# Altium PCB PA-03225-V0.4-4.PcbDoc (part 4 of 4)
Units mm, origin at the board's own origin, x right, y up, seen from the top; angles counter-clockwise.
Board outline 43 x 41 mm, 6 copper layers (Top Layer, GND, L3, L4, PWR, Bottom Layer); 103 components, 178 nets, 551 pads, 290 vias.
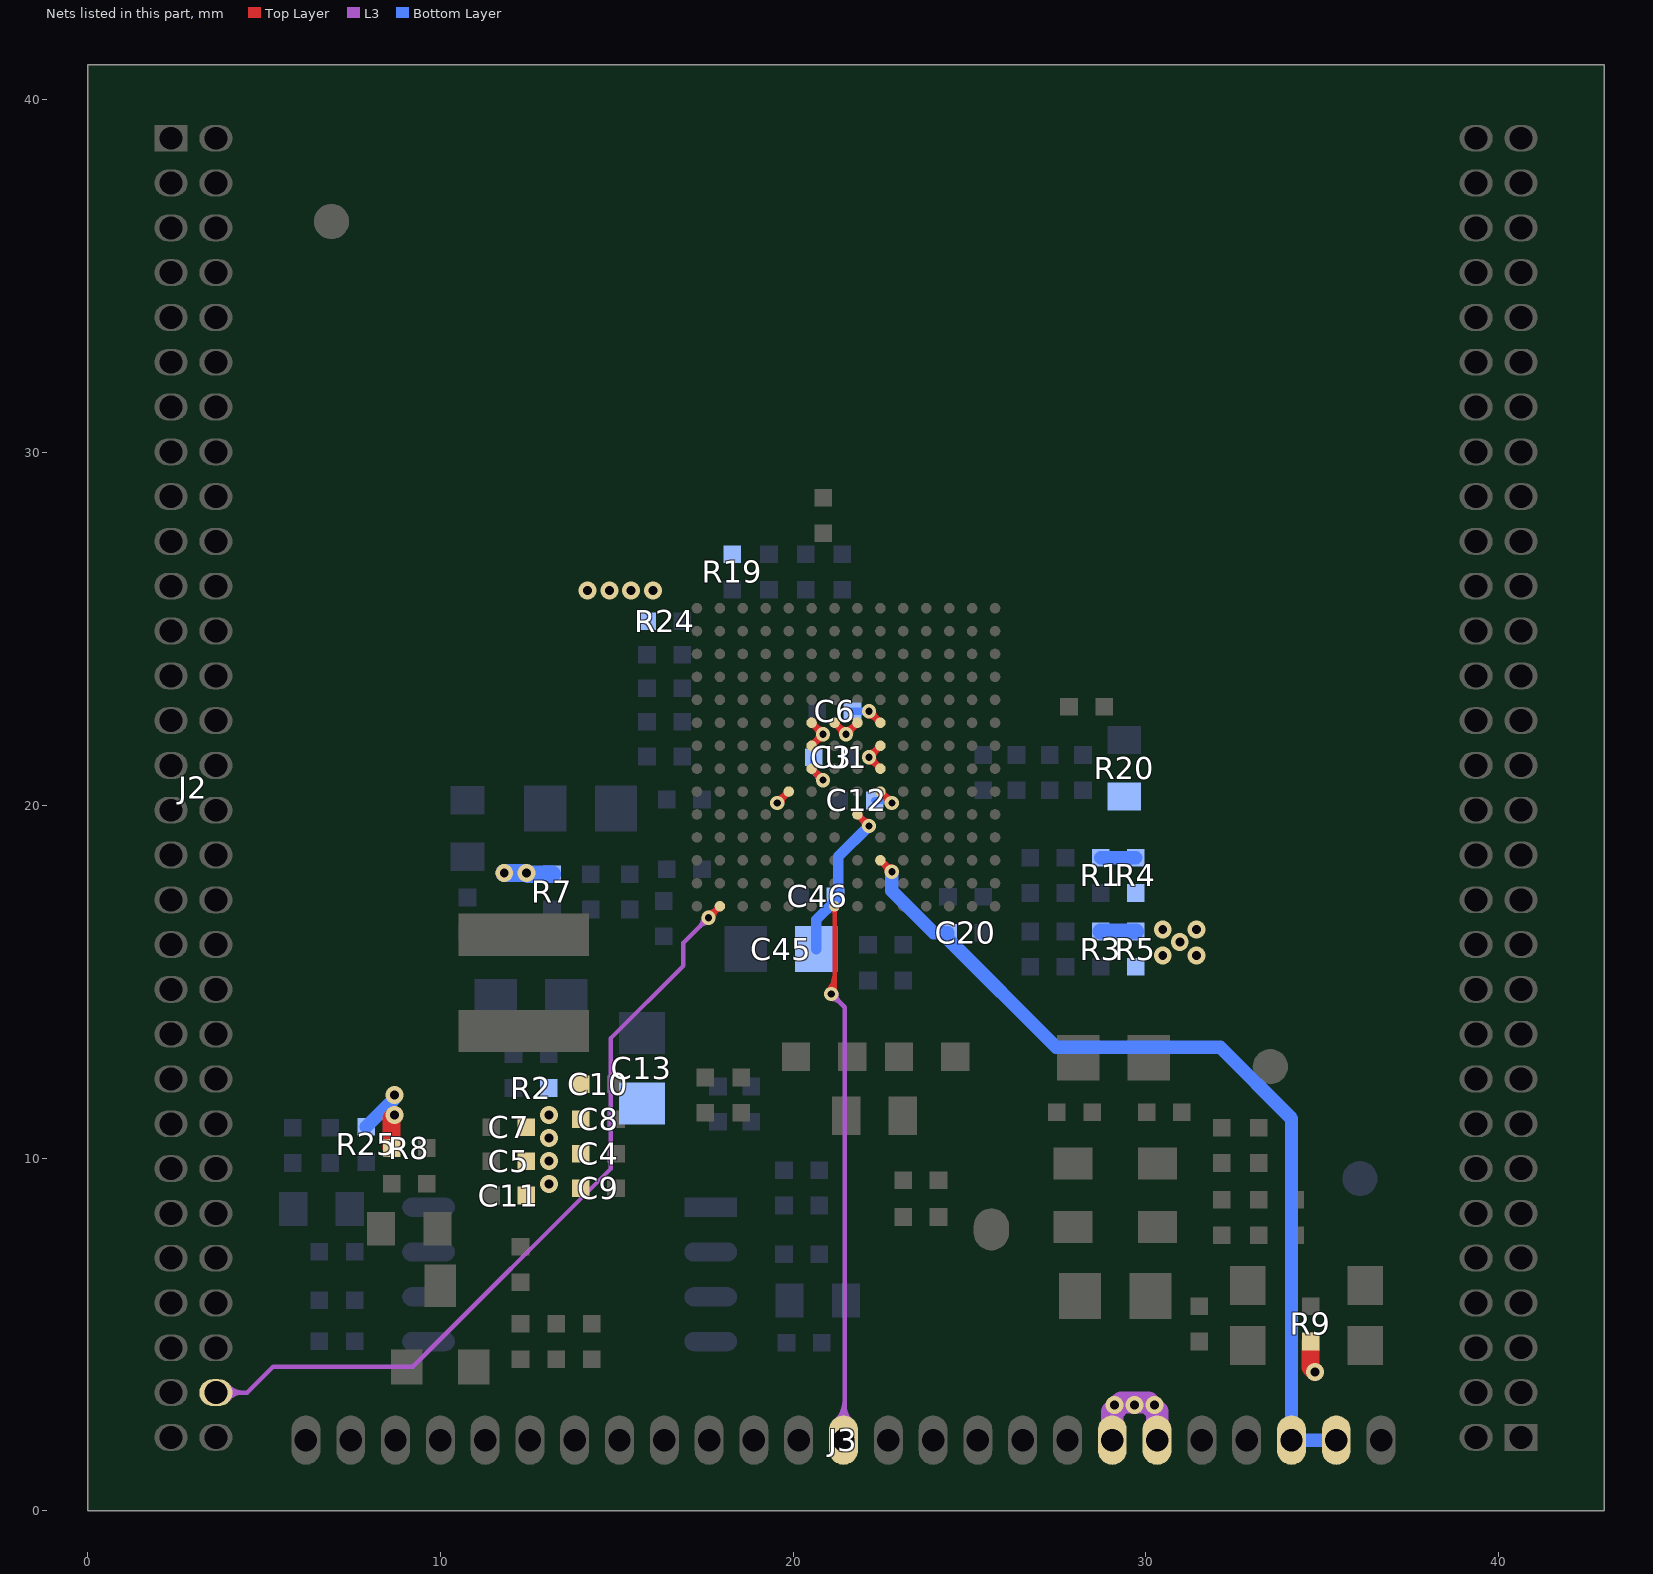
[diagram p8: the nets of this part, all layers, seen from the top]

## Via types
v1: diameter 0.508, hole 0.254, Top Layer to Bottom Layer, tented both sides, 169 vias
v2: diameter 0.406, hole 0.203, Top Layer to Bottom Layer, tented both sides, 78 vias
v3: diameter 0.356, hole 0.203, Top Layer to Bottom Layer, tented both sides, 42 vias
v4: diameter 0.7, hole 0.4, Top Layer to Bottom Layer, tented both sides, 1 vias

## Nets (pads, with @x,y where several pads share a name; then routed paths per layer and width w, separated by ;. In a path a pad name is that pad's centre, name@x,y a point inside that pad or via, vN(x,y) a via of type N, cw(c..) or ccw(c..) an arc to the next point about the centre after c; other vN are vias at no path point) (continued)
P2: J2.58 U1.P2 | length 26.6
  Top Layer w0.127: v2@17.589,16.958 ccw(c17.564,17.287) U1.P2@17.85,17.122 ; v2(17.6,16.819) U1.P2@17.925,17.144 ; v2@17.6,16.958 ccw(c17.6,17.296) 17.838,17.057 ccw(c18.077,16.819) v2@17.74,16.819 ; v2@17.63,16.955 ccw(c17.663,17.105) 17.796,17.028 ; v2@17.736,16.849 cw(c17.887,16.881) 17.81,17.015 ; v2@17.739,16.808 cw(c18.068,16.783) U1.P2@17.903,17.069 ; U1.P2@17.839,17.144 cw(c17.63,17.144) 17.777,16.996 cw(c17.925,16.848) U1.P2@17.925,17.057
  L3 w0.127: J2.58@3.635,3.355 4.523,3.355 5.258,4.089 9.22,4.089 14.825,9.694 14.825,13.394 16.891,15.46 16.891,16.11 v2(17.6,16.819) ; J2.58@3.87,3.233 cw(c4.131,3.015) 4.131,3.355 cw(c4.131,3.694) J2.58@3.87,3.477 ; J2.58@3.968,3.151 cw(c4.402,2.789) 4.402,3.355 cw(c4.402,3.92) J2.58@3.968,3.558 ; v2@17.46,16.819 cw(c17.123,16.819) 17.362,16.58 cw(c17.6,16.342) v2@17.6,16.679
P7_USB_OTG2_DP: J3.13 U1.P7 | length 18.4
  Top Layer w0.127: v2@20.983,14.755 ccw(c20.52,15.218) 21.175,15.218 ; v2@21.048,14.656 v2@21.065,14.673 ; v2@21.073,14.665 ccw(c20.827,14.911) 21.175,14.911 ; v2(21.082,14.656) v2@21.175,14.749 ; U1.P7@21.114,17.082 cw(c20.966,16.935) 21.175,16.935 cw(c21.384,16.935) U1.P7@21.236,17.082 ; v2@21.158,14.766 21.175,14.783 U1.P7@21.175,17.144
  L3 w0.127: v2@21.082,14.516 cw(c21.082,14.179) 21.32,14.417 cw(c21.559,14.656) v2@21.222,14.656 ; v2(21.082,14.656) 21.463,14.275 J3.13@21.463,2.042 ; J3.13@21.226,2.561 ccw(c20.655,3.132) 21.463,3.132 ; J3.13@21.316,2.471 ccw(c20.962,2.825) 21.463,2.825 ; 21.463,2.968 ccw(c22.039,2.968) J3.13@21.632,2.561
VCC33: J3.19 J3.20 R4.1 R5.1 R7.1 R8.1 R9.1 R19.1 R20.1 R24.2 R25.1 | length 10.7
  Top Layer w0.508: R8.1@8.619,10.287 8.619,11.144 v1(8.7,11.224) ; R9.1@34.671,4.804 34.671,4.064 v1(34.798,3.937)
  L3 w0.635: v1@29.049,2.811 v1@29.312,3.073 ; v1@29.049,2.811 J3.19@29.049,2.008 v1@29.049,2.811 ; v1@29.049,2.811 v1@29.312,3.073 ; v1@29.312,3.073 v1@30.065,3.073 ; v1@29.312,3.073 v1@30.065,3.073 ; v1@30.065,3.073 v1@30.319,2.819 ; v1@30.065,3.073 v1@30.319,2.819 ; v1@30.319,2.819 J3.20@30.319,2.008 v1@30.319,2.819
  Bottom Layer w0.381: R25.1@7.899,10.889 8.7,11.689 v1(8.7,11.786)
  Bottom Layer w0.508: v1(11.811,18.087) v1(12.446,18.087) 12.483,18.05 R7.1@13.165,18.05
  other v1: 29.108,2.997 29.68,2.997 30.251,2.997 30.48,15.748 31.442,15.748 30.963,16.129 30.48,16.485 31.442,16.485 14.173,26.094 14.791,26.094 15.409,26.094 16.027,26.094
VDD_HIGH_IN_3V3: R3.1 R5.2 | length 1
  Bottom Layer w0.457: R3.1@28.72,16.426 R5.2@29.718,16.426
VDD_SNVS_IN: C20.2 J3.23 J3.24 U1.M9 | length 26
  Top Layer w0.203: U1.M9@22.475,18.444 v2(22.8,18.119) ; v2@22.698,18.119 ccw(c22.453,18.119) 22.627,18.292 ccw(c22.8,18.465) v2@22.8,18.22
  L3 w0.127: J3.24@35.296,2.008 J3.24@35.399,2.008
  Bottom Layer w0.381: v2(22.8,18.119) 22.8,17.578 23.986,16.392 C20.2@24.392,16.392 24.392,16.214 27.458,13.148 32.106,13.148 34.129,11.125 J3.23@34.129,2.008 J3.24@35.399,2.008
VDD_SOC_IN: C3.1 C4.1 C5.1 C6.1 C7.1 C8.1 C9.1 C10.1 C11.1 C12.2 C13.2 R2.1 U1.F6 U1.F7 U1.F8 U1.F9 U1.G6 U1.G9 U1.H6 U1.H9 U1.J5 U1.J9 | length 10.6
  Top Layer w0.203: v2(19.55,20.069) U1.J5@19.875,20.394 ; v2@19.55,20.17 ccw(c19.55,20.415) 19.723,20.242 ccw(c19.897,20.069) v2@19.652,20.069 ; U1.H6@20.525,21.044 v2(20.85,20.719) ; U1.G6@20.525,21.694 v2(20.85,22.019) U1.F6@20.525,22.344 ; v2@20.748,20.719 ccw(c20.503,20.719) 20.677,20.892 ccw(c20.85,21.065) v2@20.85,20.82 ; v2@20.85,21.917 ccw(c20.85,21.672) 20.677,21.845 ccw(c20.503,22.019) 20.748,22.019 ccw(c20.503,22.019) 20.677,22.192 ccw(c20.85,22.366) v2@20.85,22.12 ; U1.F7@21.175,22.344 v2(21.5,22.019) U1.F8@21.825,22.344 ; v2@21.398,22.019 ccw(c21.153,22.019) 21.327,22.192 ccw(c21.5,22.365) 21.5,22.12 ccw(c21.5,22.365) 21.673,22.192 ccw(c21.847,22.019) v2@21.602,22.019 ; v2@22.15,21.267 cw(c22.15,21.022) 22.323,21.195 cw(c22.497,21.369) 22.252,21.369 cw(c22.497,21.369) 22.323,21.542 cw(c22.15,21.715) v2@22.15,21.47 ; v2@22.15,22.567 cw(c22.15,22.322) 22.323,22.495 cw(c22.497,22.669) v2@22.252,22.669 ; v2(22.15,22.669) U1.F9@22.475,22.344 ; U1.J9@22.475,20.394 v2(22.8,20.069) ; U1.H9@22.475,21.044 v2(22.15,21.369) U1.G9@22.475,21.694 ; v2@22.698,20.069 ccw(c22.453,20.069) 22.627,20.242 ccw(c22.8,20.415) v2@22.8,20.17
  Bottom Layer w0.203: C3.1@20.582,21.361 20.582,20.987 v2(20.85,20.719) ; v2@20.748,20.719 ccw(c20.503,20.719) 20.677,20.892 ccw(c20.85,21.065) v2@20.85,20.82 ; C6.1@21.684,22.669 v2(22.15,22.669) ; C12.2@22.31,20.141 22.728,20.141 v2(22.8,20.069)
  other v1: 13.081,9.271 13.081,9.922 13.081,10.573 13.081,11.224
VDD_USB_3V: C45.2 C46.2 U1.K8 | length 5
  Top Layer w0.203: U1.K8@21.825,19.744 v2(22.15,19.419) ; v2@22.048,19.419 ccw(c21.803,19.419) 21.977,19.592 ccw(c22.15,19.765) v2@22.15,19.52
  Bottom Layer w0.305: C45.2@20.66,15.928 20.66,16.76 21.201,17.301 C46.2@21.201,17.423 21.282,17.504 21.282,18.55 v2(22.15,19.419)
VDDA_ADC_3V3: R1.1 R4.2 | length 1
  Bottom Layer w0.381: R1.1@28.72,18.519 R4.2@29.718,18.519
pads on no net: U1.N13 U1.P13

## Polygon pours and split planes (outlines as drawn)
GND on L3 "Top Layer-GND" (solid, remove dead copper, pour order 5): 0,41 43,41 43,0 0,0
GND on Top Layer "Top Layer-GND" (solid, remove dead copper, pour order 6): 0,41 43,41 43,0 0,0
GND on Bottom Layer "Top Layer-GND" (solid, remove dead copper, pour order 7): 0,41 43,41 43,0 0,0
GND on L4 "Top Layer-GND" (solid, remove dead copper, pour order 8): 0,41 43,41 43,0 0,0
GND on GND (split plane): 42.49,0.51 0.51,0.51 0.51,40.49 42.49,40.49
VDD_SOC_IN on PWR (split plane): 29.589,21.782 29.589,9.071 28.984,8.466 13.053,8.466 12.401,9.118 12.401,10.212 12.401,14.027 17.973,19.599 21.238,22.864 28.506,22.864
DCDC_3V3 on PWR (split plane): 12.142,10.212 12.142,9.064 12.152,9.015 12.18,8.973 12.908,8.245 12.95,8.217 12.999,8.207 29.038,8.207 29.087,8.217 29.129,8.245 29.772,8.888 36.193,8.888 36.193,5.057 11.077,5.057 9.248,6.886 9.248,12.215 9.452,12.418 12.142,12.418
VCC33 on PWR (split plane): 42.49,0.51 0.51,0.51 0.51,40.49 42.49,40.49

## Keep-outs
Keep-Out Layer:
  the board outline again, w0.254

## Other copper
Top Layer:
  region net GND: 14.58,15.113 14.58,12.497 14.707,12.37 14.707,8.788 14.859,8.636 15.291,8.636 15.545,8.89 15.545,15.316 15.367,15.494 14.961,15.494
  pour cut-out: 8.865,25.801 8.994,25.672 13.523,25.672 13.523,26.303 13.359,26.467 9.002,26.467 8.865,26.329
  pour cut-out: 26.2,4.686 26.64,4.246 30.074,4.246 32.029,6.202 32.029,14.362 31.472,14.92 26.769,14.92 26.2,14.35
  pour cut-out: 21.006,13.412 21.006,10.82 21.488,10.338 24.464,10.338 24.992,10.866 24.992,13.62 24.083,14.529 22.113,14.529 21.268,13.683
  pour cut-out: 16.535,26.365 26.475,26.365 26.547,26.293 26.547,16.383 26.532,16.369 16.5,16.369
  region net VCC33: 8.89,10.287 9.119,10.516 9.119,11.864 8.89,12.093 8.41,12.093 8.255,11.938 8.255,10.287
  region net NetL1_1: 10.668,16.871 10.755,16.958 13.014,16.958 14.651,18.595 17.632,18.595 17.632,18.344 17.526,18.237 17.039,18.237 14.55,15.748 10.784,15.748 10.668,15.864
  region net VDD_SOC_IN: 13.716,12.319 12.506,11.109 12.18,11.109 12.18,8.699 13.862,8.699 14.224,9.06 14.224,12.319
  region net DCDC_OUT: 14.199,13.284 12.319,11.405 10.77,11.405 10.606,11.569 10.606,13.411 11.385,14.19 14.181,14.19 14.199,14.173
  pour cut-out: 33.53,14.095 cw(c33.53,12.595) 35.03,12.595 cw(c33.53,12.595) 33.53,11.095 cw(c33.53,12.595) 32.03,12.595 cw(c33.53,12.595)
  pour cut-out: 6.912,35.054 cw(c6.912,36.554) 5.412,36.554 cw(c6.912,36.554) 6.912,38.054 cw(c6.912,36.554) 8.412,36.554 cw(c6.912,36.554)
L3:
  pour cut-out: 26.547,19.387 26.547,18.887 26.64,18.794 29.791,18.794 29.817,18.769 29.817,19.027 29.235,19.609 26.563,19.609
  pour cut-out: 18.059,6.339 15.6,3.88 15.6,3.556 16.434,3.556 18.698,5.82 18.698,6.121 18.393,6.426 18.14,6.426
  pour cut-out: 16.535,26.365 26.475,26.365 26.547,26.293 26.547,16.383 26.532,16.369 16.5,16.369
L4:
  pour cut-out: 8.81,14.021 11.074,16.285 11.074,16.713 10.77,17.018 10.389,17.018 8.327,14.957 8.327,14.177 8.484,14.021
  pour cut-out: 16.535,26.365 26.475,26.365 26.547,26.293 26.547,16.383 26.532,16.369 16.5,16.369
Bottom Layer:
  region net VDD_SOC_IN: 16.559,12.245 16.916,11.887 16.916,9.601 16.078,8.763 12.903,8.763 12.675,8.992 12.675,12.067 12.852,12.245
  region net MCU_DCDC_IN: 13.97,20.126 13.97,18.076 14.266,17.78 16.002,17.78 16.103,17.679 16.51,17.679 16.918,18.087 16.918,20.035 16.379,20.574 14.418,20.574
  pour cut-out: 16.535,26.365 26.475,26.365 26.547,26.293 26.547,16.383 26.532,16.369 16.5,16.369
  region net GND: 19.05,29.997 19.507,30.455 21.285,30.455 21.895,29.845 21.895,27 21.717,26.822 21.692,26.848 19.05,26.848
  region net GND: 13.682,20.642 14.072,21.031 16.08,21.031 16.207,21.158 16.207,24.501 16.027,24.681 14.461,24.681 13.538,25.603 13.538,26.217 13.339,26.416 11.836,26.416 11.836,19.812 12.395,19.253 13.651,19.253 13.682,19.285
  region net VCC33: 18.567,26.848 16.789,26.848 16.307,26.365 16.307,25.269 16.108,25.07 14.63,25.07 13.919,25.781 13.919,27.108 14.7,27.889 18.481,27.889 18.582,27.788 18.567,27.773
  region net VCC33: 7.671,10.706 7.671,11.913 7.823,12.065 8.89,12.065 9.017,11.938 9.017,10.975 8.735,10.693 7.684,10.693
  region net VCC33: 11.519,18.009 11.748,17.78 12.099,17.78 12.375,17.504 13.335,17.504 13.395,17.563 13.395,18.161 13.082,18.474 11.692,18.474 11.519,18.301
  region net DCDC_OUT: 12.401,11.633 12.401,14.901 12.189,15.113 11.043,15.113 10.77,14.84 10.77,11.455 10.846,11.379 12.192,11.379 12.395,11.582
  region net VCC33: 30.827,20.719 31.74,19.806 31.74,15.433 31.471,15.164 29.566,15.164 29.464,15.265 29.464,15.757 30.006,15.757 30.226,15.977 30.226,16.84 29.921,17.145 29.424,17.145 29.337,17.232 29.337,17.786 29.382,17.831 30.065,17.831 30.353,18.119 30.353,19.329 30.048,19.634 28.829,19.634 28.829,20.592 28.956,20.719
  pour cut-out: 36.07,10.92 cw(c36.07,9.42) 37.57,9.42 cw(c36.07,9.42) 36.07,7.92 cw(c36.07,9.42) 34.57,9.42 cw(c36.07,9.42)
  pour cut-out: 6.912,35.054 cw(c6.912,36.554) 5.412,36.554 cw(c6.912,36.554) 6.912,38.054 cw(c6.912,36.554) 8.412,36.554 cw(c6.912,36.554)
PWR (plane layer: these items are gaps in the copper):
  lines w0.254: 12.268,12.548 9.398,12.548 9.119,12.268 9.119,6.833 11.024,4.928 36.322,4.928 36.322,9.017 29.718,9.017 ; 29.718,9.017 29.038,8.337 12.999,8.337 12.272,9.064 12.272,10.212 12.272,14.081 17.882,19.691 21.184,22.994 22.8,22.994 28.56,22.994 29.718,21.836 29.718,9.017

## Silkscreen, mask and mechanical layers (free items; w line width, h text height)
Top Overlay:
  lines w0.127: 8.128,10.922 8.128,14.199 10.135,14.199 10.135,12.156 13.08,12.156 13.08,10.051 13.08,8.382 10.77,8.382 10.77,9.906 10.77,10.922 8.128,10.922 ; 30.988,3.448 37.682,3.448 37.682,11.656 31.598,11.656 31.598,6.731 30.988,6.731 30.988,3.448 ; 31.926,15.24 37.973,15.24 37.973,23.644 32.41,23.644 32.41,18.821 31.926,18.821 31.926,15.24
  text "PA-03225" at 17.526,37.645 h1.52
  text "MARK" at 8.885,36.119 h1.02
  text "V0.4" at 17.526,34.952 h1.52
  text "20.09.17" at 17.526,32.258 h1.52
  text "MARK" at 34.615,13.945 h1.02
Bottom Overlay:
  circle w0.127: c6.455,19.961 r0.559
  circle w0.127: c5.666,3.985 r0.559
  rectangle: 12.454,15.52 17.01,15.799
  rectangle: 5.512,22.669 10.541,22.93
  lines w0.127: 5.055,3.429 7.569,3.429 8.466,4.326 8.466,9.347 5.207,9.347 ; 5.055,3.55 5.055,9.316 5.207,9.468 ; 5.258,14.453 5.258,16.84 5.258,19.101 5.258,20.65 7.849,20.65 7.849,14.58 7.696,14.427 7.569,14.3 5.41,14.3 5.258,14.453 ; 5.563,22.89 5.563,26.34 10.49,26.34 10.49,22.89 5.563,22.89 ; 12.454,15.52 12.454,18.618 15.85,18.618 15.85,17.777 17.01,17.777 17.01,15.52 12.454,15.52
  text "MARK" at 12.306,36.046 h1.02
  text "A" at 6.174,19.634 h0.76
  text "MARK" at 37.782,13.872 h1.02
  text "A" at 5.385,3.658 h0.76
Mechanical 1:
  lines w0.254: -8.255,41 -1.905,41 ; -8.052,82 -1.702,82 ; -6.985,0 -0.635,0 ; -3.073,39.832 -1.905,41 ; -2.972,42.067 -1.905,41 ; -2.87,80.832 -1.702,82 ; -2.769,83.067 -1.702,82 ; -1.803,-1.168 -0.635,0 ; -1.702,1.067 -0.635,0 ; 41.933,-7.417 43,-6.35 ; 43,-12.7 43,-6.35 ; 44.168,-7.518 43,-6.35 ; 0,0 0,41 ; 0,0 43,0 ; 0,0 0,-5 43,-5 ; 0,41 0,82 ; 0,41 43,41 ; 0,82 43,82 ; 0,82 0,87 43,87 ; 43,-5 86,-5 86,0 ; 43,-5 43,-5 ; 43,-5 43,0 ; 43,0 43,41 ; 43,0 86,0 ; 43,41 86,41 ; 43,41 43,82 ; 43,82 43,87 ; 43,82 86,82 ; 43,87 86,87 86,82 ; 86,0 86,41 ; 86,41 86,82
  text "V-CUT" at -8.052,82.635 h1.02
  text "V-CUT" at -8.255,41.635 h1.02
  text "V-CUT" at -6.985,0.635 h1.02
  text "V-CUT" at 42.365,-12.7 h1.02 r90
Mechanical 16:
  drawing of 498 lines, arcs and shapes, not listed
  text "1" at -32.231,114.704 h1.78
  text "2" at 40.413,114.704 h1.78
  text "3" at 113.565,114.704 h1.78
  text "4" at 186.463,114.704 h1.78
  text "A" at -71.372,74.791 h1.78
  text "A" at 220.448,74.791 h1.78
  text "B" at -71.372,26.734 h1.78
  text "B" at 220.448,26.734 h1.78
  text "版本：" at 51.192,-17.098 h3
  text "页面大小：" at 77.092,-17.223 h3
  text "文件名称：" at -13.383,-17.298 h3
  text ".Print_Date" at 151.217,-17.423 h2.8
  text "A4" at 92.492,-17.448 h3
  text "日期：" at 143.717,-17.498 h3
  text "时间：" at 177.542,-17.498 h3
  text ".Print_Time" at 185.717,-17.623 h2.8
  text "PCB板加工说明" at -63.858,-20.723 h7
  text "0.203" at 93.242,-21.74 h2
  text "C" at -71.372,-21.78 h1.78
  text "0.102" at 2.182,-21.767 h2
  text "C" at 220.448,-21.78 h1.78
  text "0.076" at 48.87,-21.942 h2
  text "最" at -14,-21.966 h3.08
  text "小" at -10.779,-21.966 h3.08
  text "线" at -7.558,-21.966 h3.08
  text "距" at -4.337,-21.966 h3.08
  text ":" at -1.116,-21.966 h3.08
  text "（" at 10.402,-21.966 h3.08
  text "m" at 13.623,-21.966 h3.08
  text "m" at 15.276,-21.966 h3.08
  text "）" at 16.929,-21.966 h3.08
  text "板" at 115.241,-21.966 h3.08
  text "尺" at 118.462,-21.966 h3.08
  text "寸" at 121.683,-21.966 h3.08
  text ":" at 124.904,-21.966 h3.08
  text "×" at 139.78,-21.966 h3.08
  text "（" at 152.918,-21.966 h3.08
  text "m" at 156.139,-21.966 h3.08
  text "m" at 157.792,-21.966 h3.08
  text "）" at 159.445,-21.966 h3.08
  text "最" at 77.016,-22.066 h3.08
  text "小" at 80.237,-22.066 h3.08
  text "孔" at 83.458,-22.066 h3.08
  text "径" at 86.679,-22.066 h3.08
  text ":" at 89.9,-22.066 h3.08
  text "（" at 103.03,-22.066 h3.08
  text "m" at 106.251,-22.066 h3.08
  text "m" at 107.903,-22.066 h3.08
  text "）" at 109.556,-22.066 h3.08
  text "最" at 32.936,-22.141 h3.08
  text "小" at 36.157,-22.141 h3.08
  text "线" at 39.378,-22.141 h3.08
  text "宽" at 42.599,-22.141 h3.08
  text ":" at 45.82,-22.141 h3.08
  text "（" at 57.304,-22.141 h3.08
  text "m" at 60.525,-22.141 h3.08
  text "m" at 62.178,-22.141 h3.08
  text "）" at 63.831,-22.141 h3.08
  text "86" at 130.495,-22.148 h2
  text "92" at 144.211,-22.148 h2
  text "内" at 14.97,-27.105 h2.75
  text "层" at 17.851,-27.105 h2.75
  text "铜" at 20.733,-27.105 h2.75
  text "厚" at 23.615,-27.105 h2.75
  text "原" at -66.4,-27.184 h2.75
  text "文" at -63.518,-27.184 h2.75
  text "件" at -60.636,-27.184 h2.75
  text "格" at -57.754,-27.184 h2.75
  text "式" at -54.872,-27.184 h2.75
  text "及" at -51.99,-27.184 h2.75
  text "版" at -49.108,-27.184 h2.75
  text "本" at -46.226,-27.184 h2.75
  text "板" at -33.92,-27.184 h2.75
  text "材" at -31.038,-27.184 h2.75
  text "类" at -28.156,-27.184 h2.75
  text "型" at -25.274,-27.184 h2.75
  text "层" at -10.828,-27.184 h2.75
  text "数" at -7.946,-27.184 h2.75
  text "板" at 3.086,-27.184 h2.75
  text "厚" at 5.967,-27.184 h2.75
  text "外" at 33.71,-27.184 h2.75
  text "层" at 36.592,-27.184 h2.75
  text "铜" at 39.474,-27.184 h2.75
  text "厚" at 42.355,-27.184 h2.75
  text "表" at 56.669,-27.184 h2.75
  text "面" at 59.551,-27.184 h2.75
  text "处" at 62.433,-27.184 h2.75
  text "理" at 65.315,-27.184 h2.75
  text "：" at 68.197,-27.184 h2.75
  text "阻焊和丝印" at 92.955,-27.184 h2.75
  text "验" at 123.279,-27.184 h2.75
  text "收" at 126.16,-27.184 h2.75
  text "标" at 129.042,-27.184 h2.75
  text "准" at 131.924,-27.184 h2.75
  text "其" at 157.323,-27.184 h2.75
  text "它" at 160.205,-27.184 h2.75
  text "特" at 188.492,-27.184 h2.75
  text "殊" at 191.374,-27.184 h2.75
  text "加" at 194.256,-27.184 h2.75
  text "工" at 197.138,-27.184 h2.75
  text "要" at 200.02,-27.184 h2.75
  text "求" at 202.902,-27.184 h2.75
  text ":" at 205.784,-27.184 h2.75
  text "√" at 13.297,-30.973 h3
  text "□" at -67.457,-30.998 h2.75
  text "G" at -64.581,-30.998 h2.75
  text "E" at -63.14,-30.998 h2.75
  text "R" at -61.699,-30.998 h2.75
  text "B" at -60.258,-30.998 h2.75
  text "E" at -58.817,-30.998 h2.75
  text "R" at -57.376,-30.998 h2.75
  text "□" at -41.278,-30.998 h2.75
  text "√" at -40.696,-30.993 h3
  text "F" at -38.439,-30.998 h2.75
  text "R" at -36.998,-30.998 h2.75
  text "4" at -35.557,-30.998 h2.75
  text "(" at -34.116,-30.998 h2.75
  text "普" at -32.675,-30.998 h2.75
  text "通" at -29.836,-30.998 h2.75
  text ")" at -26.996,-30.998 h2.75
  text "□" at -14.043,-30.998 h2.75
  text "单" at -11.203,-30.998 h2.75
  text "面" at -8.363,-30.998 h2.75
  text "板" at -5.524,-30.998 h2.75
  text "□" at -0.805,-30.998 h2.75
  text "0" at 2.034,-30.998 h2.75
  text "." at 3.475,-30.998 h2.75
  text "8" at 4.916,-30.998 h2.75
  text "m" at 6.357,-30.998 h2.75
  text "m" at 7.798,-30.998 h2.75
  text "□" at 13.743,-30.998 h2.75
  text "1" at 16.583,-30.998 h2.75
  text "8" at 18.024,-30.998 h2.75
  text "u" at 19.465,-30.998 h2.75
  text "m" at 20.905,-30.998 h2.75
  text "/" at 22.346,-30.998 h2.75
  text "0" at 23.787,-30.998 h2.75
  text "." at 25.228,-30.998 h2.75
  text "5" at 26.669,-30.998 h2.75
  text "o" at 28.11,-30.998 h2.75
  text "z" at 29.551,-30.998 h2.75
  text "□" at 32.774,-30.998 h2.75
  text "1" at 35.614,-30.998 h2.75
  text "8" at 37.055,-30.998 h2.75
  text "u" at 38.496,-30.998 h2.75
  text "m" at 39.937,-30.998 h2.75
  text "/" at 41.378,-30.998 h2.75
  text "0" at 42.819,-30.998 h2.75
  text "." at 44.26,-30.998 h2.75
  text "5" at 45.701,-30.998 h2.75
  text "o" at 47.141,-30.998 h2.75
  text "z" at 48.582,-30.998 h2.75
  text "□" at 51.806,-30.998 h2.75
  text "有" at 54.645,-30.998 h2.75
  text "铅" at 57.485,-30.998 h2.75
  text "喷" at 60.324,-30.998 h2.75
  text "锡" at 63.164,-30.998 h2.75
  text "过" at 76.927,-30.998 h2.75
  text "孔" at 79.766,-30.998 h2.75
  text "阻" at 82.606,-30.998 h2.75
  text "焊" at 85.445,-30.998 h2.75
  text "处" at 88.285,-30.998 h2.75
  text "理" at 91.124,-30.998 h2.75
  text "方" at 93.964,-30.998 h2.75
  text "式" at 96.804,-30.998 h2.75
  text "：" at 99.643,-30.998 h2.75
  text "□" at 115.793,-30.998 h2.75
  text "I" at 118.632,-30.998 h2.75
  text "P" at 120.073,-30.998 h2.75
  text "C" at 121.514,-30.998 h2.75
  text "-" at 122.955,-30.998 h2.75
  text "A" at 124.396,-30.998 h2.75
  text "-" at 125.837,-30.998 h2.75
  text "6" at 127.278,-30.998 h2.75
  text "0" at 128.719,-30.998 h2.75
  text "0" at 130.16,-30.998 h2.75
  text "G" at 131.601,-30.998 h2.75
  text "I" at 134.483,-30.998 h2.75
  text "级" at 135.924,-30.998 h2.75
  text "手" at 143.282,-30.998 h2.75
  text "指" at 146.122,-30.998 h2.75
  text "(" at 148.962,-30.998 h2.75
  text "接" at 150.402,-30.998 h2.75
  text "触" at 153.242,-30.998 h2.75
  text "插" at 156.082,-30.998 h2.75
  text "头" at 158.921,-30.998 h2.75
  text ")" at 161.761,-30.998 h2.75
  text "倒" at 163.202,-30.998 h2.75
  text "角" at 166.041,-30.998 h2.75
  text "：" at 168.881,-30.998 h2.75
  text "1" at 178.173,-30.998 h2.75
  text "." at 179.614,-30.998 h2.75
  text "□" at -67.457,-35.321 h2.75
  text "p" at -64.617,-35.321 h2.75
  text "r" at -63.176,-35.321 h2.75
  text "o" at -61.735,-35.321 h2.75
  text "t" at -60.295,-35.321 h2.75
  text "e" at -58.854,-35.321 h2.75
  text "l" at -57.413,-35.321 h2.75
  text "9" at -54.531,-35.321 h2.75
  text "9" at -53.09,-35.321 h2.75
  text "s" at -51.649,-35.321 h2.75
  text "e" at -50.208,-35.321 h2.75
  text "□" at -41.278,-35.321 h2.75
  text "F" at -38.439,-35.321 h2.75
  text "R" at -36.998,-35.321 h2.75
  text "4" at -35.557,-35.321 h2.75
  text "高" at -32.675,-35.321 h2.75
  text "T" at -29.836,-35.321 h2.75
  text "G" at -28.395,-35.321 h2.75
  text "1" at -25.513,-35.321 h2.75
  text "7" at -24.072,-35.321 h2.75
  text "0" at -22.631,-35.321 h2.75
  text "度" at -21.19,-35.321 h2.75
  text "□" at -14.043,-35.321 h2.75
  text "双" at -11.203,-35.321 h2.75
  text "面" at -8.363,-35.321 h2.75
  text "板" at -5.524,-35.321 h2.75
  text "□" at -0.805,-35.321 h2.75
  text "1" at 2.034,-35.321 h2.75
  text "." at 3.475,-35.321 h2.75
  text "0" at 4.916,-35.321 h2.75
  text "m" at 6.357,-35.321 h2.75
  text "m" at 7.798,-35.321 h2.75
  text "m" at 9.239,-35.321 h2.75
  text "□" at 13.743,-35.321 h2.75
  text "3" at 16.583,-35.321 h2.75
  text "5" at 18.024,-35.321 h2.75
  text "u" at 19.465,-35.321 h2.75
  text "m" at 20.905,-35.321 h2.75
  text "/" at 22.346,-35.321 h2.75
  text "1" at 23.787,-35.321 h2.75
  text "o" at 25.228,-35.321 h2.75
  text "z" at 26.669,-35.321 h2.75
  text "□" at 32.774,-35.321 h2.75
  text "√" at 33.357,-35.316 h3
  text "3" at 35.614,-35.321 h2.75
  text "5" at 37.055,-35.321 h2.75
  text "u" at 38.496,-35.321 h2.75
  text "m" at 39.937,-35.321 h2.75
  text "/" at 41.378,-35.321 h2.75
  text "1" at 42.819,-35.321 h2.75
  text "o" at 44.26,-35.321 h2.75
  text "z" at 45.701,-35.321 h2.75
  text "□" at 51.806,-35.321 h2.75
  text "无" at 54.645,-35.321 h2.75
  text "铅" at 57.485,-35.321 h2.75
  text "喷" at 60.324,-35.321 h2.75
  text "锡" at 63.164,-35.321 h2.75
  text "□" at 76.927,-35.321 h2.75
  text "√" at 77.51,-35.316 h3
  text "按" at 79.766,-35.321 h2.75
  text "文" at 82.606,-35.321 h2.75
  text "件" at 85.445,-35.321 h2.75
  text "设" at 88.285,-35.321 h2.75
  text "计" at 91.124,-35.321 h2.75
  text "□" at 115.793,-35.321 h2.75
  text "I" at 118.632,-35.321 h2.75
  text "P" at 120.073,-35.321 h2.75
  text "C" at 121.514,-35.321 h2.75
  text "-" at 122.955,-35.321 h2.75
  text "A" at 124.396,-35.321 h2.75
  text "-" at 125.837,-35.321 h2.75
  text "6" at 127.278,-35.321 h2.75
  text "0" at 128.719,-35.321 h2.75
  text "0" at 130.16,-35.321 h2.75
  text "G" at 131.601,-35.321 h2.75
  text "I" at 134.483,-35.321 h2.75
  text "I" at 135.924,-35.321 h2.75
  text "级" at 137.365,-35.321 h2.75
  text "□" at 143.282,-35.321 h2.75
  text "是" at 146.122,-35.321 h2.75
  text "□" at 157.607,-35.321 h2.75
  text "否" at 160.447,-35.321 h2.75
  text "2" at 178.173,-35.321 h2.75
  text "." at 179.611,-35.321 h2.75
  text "□" at -67.457,-39.644 h2.75
  text "p" at -64.617,-39.644 h2.75
  text "r" at -63.176,-39.644 h2.75
  text "o" at -61.735,-39.644 h2.75
  text "t" at -60.295,-39.644 h2.75
  text "e" at -58.854,-39.644 h2.75
  text "l" at -57.413,-39.644 h2.75
  text "d" at -54.531,-39.644 h2.75
  text "x" at -53.09,-39.644 h2.75
  text "p" at -51.649,-39.644 h2.75
  text "2" at -48.767,-39.644 h2.75
  text "0" at -47.326,-39.644 h2.75
  text "0" at -45.885,-39.644 h2.75
  text "4" at -44.444,-39.644 h2.75
  text "□" at -41.278,-39.644 h2.75
  text "F" at -38.439,-39.644 h2.75
  text "R" at -36.998,-39.644 h2.75
  text "4" at -35.557,-39.644 h2.75
  text "无" at -32.675,-39.644 h2.75
  text "卤" at -29.836,-39.644 h2.75
  text "素" at -26.996,-39.644 h2.75
  text "□" at -14.043,-39.644 h2.75
  text "4" at -11.203,-39.644 h2.75
  text "层" at -9.762,-39.644 h2.75
  text "□" at -0.805,-39.644 h2.75
  text "1" at 2.034,-39.644 h2.75
  text "." at 3.475,-39.644 h2.75
  text "2" at 4.916,-39.644 h2.75
  text "m" at 6.357,-39.644 h2.75
  text "m" at 7.798,-39.644 h2.75
  text "m" at 9.239,-39.644 h2.75
  text "□" at 13.743,-39.644 h2.75
  text "7" at 16.583,-39.644 h2.75
  text "0" at 18.024,-39.644 h2.75
  text "u" at 19.465,-39.644 h2.75
  text "m" at 20.905,-39.644 h2.75
  text "/" at 22.346,-39.644 h2.75
  text "2" at 23.787,-39.644 h2.75
  text "o" at 25.228,-39.644 h2.75
  text "z" at 26.669,-39.644 h2.75
  text "□" at 32.774,-39.644 h2.75
  text "7" at 35.614,-39.644 h2.75
  text "0" at 37.055,-39.644 h2.75
  text "u" at 38.496,-39.644 h2.75
  text "m" at 39.937,-39.644 h2.75
  text "/" at 41.378,-39.644 h2.75
  text "2" at 42.819,-39.644 h2.75
  text "o" at 44.26,-39.644 h2.75
  text "z" at 45.701,-39.644 h2.75
  text "□" at 51.806,-39.644 h2.75
  text "有" at 54.645,-39.644 h2.75
  text "铅" at 57.485,-39.644 h2.75
  text "喷" at 60.324,-39.644 h2.75
  text "锡" at 63.164,-39.644 h2.75
  text "+" at 66.003,-39.644 h2.75
  text "金" at 67.444,-39.644 h2.75
  text "手" at 70.284,-39.644 h2.75
  text "指" at 73.123,-39.644 h2.75
  text "□" at 76.927,-39.644 h2.75
  text "□" at 115.793,-39.644 h2.75
  text "I" at 118.632,-39.644 h2.75
  text "P" at 120.073,-39.644 h2.75
  text "C" at 121.514,-39.644 h2.75
  text "-" at 122.955,-39.644 h2.75
  text "A" at 124.396,-39.644 h2.75
  text "-" at 125.837,-39.644 h2.75
  text "6" at 127.278,-39.644 h2.75
  text "0" at 128.719,-39.644 h2.75
  text "0" at 130.16,-39.644 h2.75
  text "G" at 131.601,-39.644 h2.75
  text "I" at 134.483,-39.644 h2.75
  text "I" at 135.924,-39.644 h2.75
  text "I" at 137.365,-39.644 h2.75
  text "级" at 138.806,-39.644 h2.75
  text "厂" at 143.282,-39.644 h2.75
  text "商" at 146.122,-39.644 h2.75
  text "标" at 148.962,-39.644 h2.75
  text "记" at 151.801,-39.644 h2.75
  text "（" at 154.641,-39.644 h2.75
  text "u" at 157.48,-39.644 h2.75
  text "l" at 158.921,-39.644 h2.75
  text "+" at 160.362,-39.644 h2.75
  text "l" at 161.803,-39.644 h2.75
  text "o" at 163.244,-39.644 h2.75
  text "g" at 164.685,-39.644 h2.75
  text "o" at 166.126,-39.644 h2.75
  text "）" at 167.567,-39.644 h2.75
  text "：" at 170.406,-39.644 h2.75
  text "其" at 79.741,-39.677 h2.75
  text "它" at 82.581,-39.677 h2.75
  text "√" at -14.425,-43.82 h3
  text "□" at -67.457,-43.967 h2.75
  text "√" at -66.874,-43.962 h3
  text "A" at -64.617,-43.967 h2.75
  text "D" at -63.176,-43.967 h2.75
  text "1" at -61.735,-43.967 h2.75
  text "0" at -60.295,-43.967 h2.75
  text "(" at -57.413,-43.967 h2.75
  text "A" at -55.972,-43.967 h2.75
  text "D" at -54.531,-43.967 h2.75
  text "9" at -53.09,-43.967 h2.75
  text ")" at -51.649,-43.967 h2.75
  text "□" at -41.278,-43.967 h2.75
  text "F" at -38.439,-43.967 h2.75
  text "R" at -36.998,-43.967 h2.75
  text "4" at -35.557,-43.967 h2.75
  text "无" at -32.675,-43.967 h2.75
  text "卤" at -29.836,-43.967 h2.75
  text "素" at -26.996,-43.967 h2.75
  text "+" at -22.716,-43.967 h2.75
  text "高" at -21.275,-43.967 h2.75
  text "T" at -18.435,-43.967 h2.75
  text "G" at -16.994,-43.967 h2.75
  text "□" at -14.043,-43.967 h2.75
  text "6" at -11.203,-43.967 h2.75
  text "层" at -9.762,-43.967 h2.75
  text "□" at -0.805,-43.967 h2.75
  text "√" at -0.223,-43.962 h3
  text "1" at 2.034,-43.967 h2.75
  text "." at 3.475,-43.967 h2.75
  text "6" at 4.916,-43.967 h2.75
  text "m" at 6.357,-43.967 h2.75
  text "m" at 7.798,-43.967 h2.75
  text "□" at 13.743,-43.967 h2.75
  text "1" at 16.583,-43.967 h2.75
  text "0" at 18.024,-43.967 h2.75
  text "5" at 19.465,-43.967 h2.75
  text "u" at 20.905,-43.967 h2.75
  text "m" at 22.346,-43.967 h2.75
  text "/" at 23.787,-43.967 h2.75
  text "3" at 25.228,-43.967 h2.75
  text "o" at 26.669,-43.967 h2.75
  text "z" at 28.11,-43.967 h2.75
  text "□" at 32.774,-43.967 h2.75
  text "1" at 35.614,-43.967 h2.75
  text "0" at 37.055,-43.967 h2.75
  text "5" at 38.496,-43.967 h2.75
  text "u" at 39.937,-43.967 h2.75
  text "m" at 41.378,-43.967 h2.75
  text "/" at 42.819,-43.967 h2.75
  text "3" at 44.26,-43.967 h2.75
  text "o" at 45.701,-43.967 h2.75
  text "z" at 47.141,-43.967 h2.75
  text "□" at 51.806,-43.967 h2.75
  text "无" at 54.645,-43.967 h2.75
  text "铅" at 57.485,-43.967 h2.75
  text "喷" at 60.324,-43.967 h2.75
  text "锡" at 63.164,-43.967 h2.75
  text "+" at 66.003,-43.967 h2.75
  text "金" at 67.444,-43.967 h2.75
  text "手" at 70.284,-43.967 h2.75
  text "指" at 73.123,-43.967 h2.75
  text "□" at 115.793,-43.967 h2.75
  text "G" at 118.632,-43.967 h2.75
  text "J" at 120.073,-43.967 h2.75
  text "B" at 121.514,-43.967 h2.75
  text "3" at 122.955,-43.967 h2.75
  text "6" at 124.396,-43.967 h2.75
  text "2" at 125.837,-43.967 h2.75
  text "A" at 127.278,-43.967 h2.75
  text "-" at 128.719,-43.967 h2.75
  text "9" at 130.16,-43.967 h2.75
  text "6" at 131.601,-43.967 h2.75
  text "□" at 143.282,-43.967 h2.75
  text "加" at 146.122,-43.967 h2.75
  text "□" at 157.607,-43.967 h2.75
  text "不" at 160.447,-43.967 h2.75
  text "加" at 163.286,-43.967 h2.75
  text "：" at 184.644,-44.859 h3.62
  text "备" at 178.215,-44.894 h3.08
  text "注" at 181.436,-44.894 h3.08
  text "□" at -67.457,-48.29 h2.75
  text "p" at -64.617,-48.29 h2.75
  text "a" at -63.176,-48.29 h2.75
  text "d" at -61.735,-48.29 h2.75
  text "s" at -60.295,-48.29 h2.75
  text "2" at -58.854,-48.29 h2.75
  text "0" at -57.413,-48.29 h2.75
  text "0" at -55.972,-48.29 h2.75
  text "5" at -54.531,-48.29 h2.75
  text "□" at -41.278,-48.29 h2.75
  text "C" at -38.439,-48.29 h2.75
  text "E" at -36.998,-48.29 h2.75
  text "M" at -35.557,-48.29 h2.75
  text "-" at -34.116,-48.29 h2.75
  text "3" at -32.675,-48.29 h2.75
  text "□" at -14.043,-48.29 h2.75
  text "8" at -11.203,-48.29 h2.75
  text "层" at -9.762,-48.29 h2.75
  text "□" at -0.805,-48.29 h2.75
  text "2" at 2.034,-48.29 h2.75
  text "." at 3.475,-48.29 h2.75
  text "0" at 4.916,-48.29 h2.75
  text "m" at 6.357,-48.29 h2.75
  text "m" at 7.798,-48.29 h2.75
  text "□" at 13.743,-48.29 h2.75
  text "1" at 16.583,-48.29 h2.75
  text "4" at 18.024,-48.29 h2.75
  text "0" at 19.465,-48.29 h2.75
  text "u" at 20.905,-48.29 h2.75
  text "m" at 22.346,-48.29 h2.75
  text "/" at 23.787,-48.29 h2.75
  text "4" at 25.228,-48.29 h2.75
  text "o" at 26.669,-48.29 h2.75
  text "z" at 28.11,-48.29 h2.75
  text "□" at 32.774,-48.29 h2.75
  text "1" at 35.614,-48.29 h2.75
  text "4" at 37.055,-48.29 h2.75
  text "0" at 38.496,-48.29 h2.75
  text "u" at 39.937,-48.29 h2.75
  text "m" at 41.378,-48.29 h2.75
  text "/" at 42.819,-48.29 h2.75
  text "4" at 44.26,-48.29 h2.75
  text "o" at 45.701,-48.29 h2.75
  text "z" at 47.141,-48.29 h2.75
  text "□" at 51.806,-48.29 h2.75
  text "水" at 54.645,-48.29 h2.75
  text "金" at 57.485,-48.29 h2.75
  text "□" at 115.793,-48.29 h2.75
  text "华" at 118.632,-48.29 h2.75
  text "为" at 121.472,-48.29 h2.75
  text "标" at 124.311,-48.29 h2.75
  text "准" at 127.151,-48.29 h2.75
  text "无" at 143.282,-48.29 h2.75
  text "铅" at 146.122,-48.29 h2.75
  text "标" at 148.962,-48.29 h2.75
  text "记" at 151.801,-48.29 h2.75
  text "（" at 154.641,-48.29 h2.75
  text "P" at 157.48,-48.29 h2.75
  text "b" at 158.921,-48.29 h2.75
  text "禁" at 160.362,-48.29 h2.75
  text "止" at 163.202,-48.29 h2.75
  text "标" at 166.041,-48.29 h2.75
  text "记" at 168.881,-48.29 h2.75
  text ")" at 171.72,-48.29 h2.75
  text "：" at 173.161,-48.29 h2.75
  text "1" at 178.268,-48.419 h2.75
  text "." at 179.706,-48.419 h2.75
  text "阻" at 76.977,-48.436 h2.75
  text "焊" at 79.816,-48.436 h2.75
  text "颜" at 82.656,-48.436 h2.75
  text "色" at 85.495,-48.436 h2.75
  text "：" at 88.335,-48.436 h2.75
  text "机械1层开孔/开槽处无敷铜的，" at 180.341,-48.555 h2.75
  text "孔/槽内不做任何沉铜处理；" at 180.468,-51.975 h2.75
  text "√" at 51.423,-52.329 h3
  text "□" at -67.457,-52.613 h2.75
  text "C" at -64.617,-52.613 h2.75
  text "A" at -63.176,-52.613 h2.75
  text "M" at -61.735,-52.613 h2.75
  text "3" at -60.295,-52.613 h2.75
  text "5" at -58.854,-52.613 h2.75
  text "0" at -57.413,-52.613 h2.75
  text "□" at -41.278,-52.613 h2.75
  text "铝" at -38.439,-52.613 h2.75
  text "基" at -35.599,-52.613 h2.75
  text "板" at -32.76,-52.613 h2.75
  text "□" at -14.043,-52.613 h2.75
  text "1" at -11.203,-52.613 h2.75
  text "0" at -9.762,-52.613 h2.75
  text "层" at -8.321,-52.613 h2.75
  text "□" at -0.805,-52.613 h2.75
  text "2" at 2.034,-52.613 h2.75
  text "." at 3.475,-52.613 h2.75
  text "5" at 4.916,-52.613 h2.75
  text "m" at 6.357,-52.613 h2.75
  text "m" at 7.798,-52.613 h2.75
  text "□" at 13.743,-52.613 h2.75
  text "1" at 16.583,-52.613 h2.75
  text "7" at 18.024,-52.613 h2.75
  text "5" at 19.465,-52.613 h2.75
  text "u" at 20.905,-52.613 h2.75
  text "m" at 22.346,-52.613 h2.75
  text "/" at 23.787,-52.613 h2.75
  text "5" at 25.228,-52.613 h2.75
  text "o" at 26.669,-52.613 h2.75
  text "z" at 28.11,-52.613 h2.75
  text "□" at 32.774,-52.613 h2.75
  text "1" at 35.614,-52.613 h2.75
  text "7" at 37.055,-52.613 h2.75
  text "5" at 38.496,-52.613 h2.75
  text "u" at 39.937,-52.613 h2.75
  text "m" at 41.378,-52.613 h2.75
  text "/" at 42.819,-52.613 h2.75
  text "5" at 44.26,-52.613 h2.75
  text "o" at 45.701,-52.613 h2.75
  text "z" at 47.141,-52.613 h2.75
  text "□" at 51.806,-52.613 h2.75
  text "沉" at 54.645,-52.613 h2.75
  text "金" at 57.485,-52.613 h2.75
  text "□" at 115.793,-52.613 h2.75
  text "中" at 118.632,-52.613 h2.75
  text "性" at 121.472,-52.613 h2.75
  text "标" at 124.311,-52.613 h2.75
  text "准" at 127.151,-52.613 h2.75
  text "□" at 143.282,-52.613 h2.75
  text "加" at 146.122,-52.613 h2.75
  text "□" at 157.607,-52.613 h2.75
  text "不" at 160.447,-52.613 h2.75
  text "加" at 163.286,-52.613 h2.75
  text "□" at 76.977,-52.758 h2.75
  text "绿" at 79.816,-52.758 h2.75
  text "色" at 82.656,-52.758 h2.75
  text "□" at 92.7,-52.758 h2.75
  text "红" at 95.54,-52.758 h2.75
  text "色" at 98.379,-52.758 h2.75
  text "反之，孔/槽内做沉铜处理。" at 180.341,-55.539 h2.75
  text "□" at -67.457,-56.936 h2.75
  text "G" at -64.617,-56.936 h2.75
  text "C" at -63.176,-56.936 h2.75
  text "C" at -61.735,-56.936 h2.75
  text "A" at -60.295,-56.936 h2.75
  text "M" at -58.854,-56.936 h2.75
  text "□" at -41.278,-56.936 h2.75
  text "高" at -38.439,-56.936 h2.75
  text "频" at -35.599,-56.936 h2.75
  text "板" at -32.76,-56.936 h2.75
  text "□" at -14.043,-56.936 h2.75
  text "1" at -11.203,-56.936 h2.75
  text "2" at -9.762,-56.936 h2.75
  text "层" at -8.321,-56.936 h2.75
  text "□" at -0.805,-56.936 h2.75
  text "3" at 2.034,-56.936 h2.75
  text "." at 3.475,-56.936 h2.75
  text "0" at 4.916,-56.936 h2.75
  text "m" at 6.357,-56.936 h2.75
  text "m" at 7.798,-56.936 h2.75
  text "□" at 13.743,-56.936 h2.75
  text "2" at 16.583,-56.936 h2.75
  text "1" at 18.024,-56.936 h2.75
  text "0" at 19.465,-56.936 h2.75
  text "u" at 20.905,-56.936 h2.75
  text "m" at 22.346,-56.936 h2.75
  text "/" at 23.787,-56.936 h2.75
  text "6" at 25.228,-56.936 h2.75
  text "o" at 26.669,-56.936 h2.75
  text "z" at 28.11,-56.936 h2.75
  text "□" at 32.774,-56.936 h2.75
  text "2" at 35.614,-56.936 h2.75
  text "1" at 37.055,-56.936 h2.75
  text "0" at 38.496,-56.936 h2.75
  text "u" at 39.937,-56.936 h2.75
  text "m" at 41.378,-56.936 h2.75
  text "/" at 42.819,-56.936 h2.75
  text "6" at 44.26,-56.936 h2.75
  text "o" at 45.701,-56.936 h2.75
  text "z" at 47.141,-56.936 h2.75
  text "□" at 51.806,-56.936 h2.75
  text "水" at 54.645,-56.936 h2.75
  text "金" at 57.485,-56.936 h2.75
  text "+" at 60.324,-56.936 h2.75
  text "金" at 61.765,-56.936 h2.75
  text "手" at 64.605,-56.936 h2.75
  text "指" at 67.444,-56.936 h2.75
  text "□" at 115.793,-56.936 h2.75
  text "其" at 118.632,-56.936 h2.75
  text "它" at 121.472,-56.936 h2.75
  text "阻" at 143.282,-56.936 h2.75
  text "抗" at 146.122,-56.936 h2.75
  text "要" at 148.962,-56.936 h2.75
  text "求" at 151.801,-56.936 h2.75
  text "(" at 154.641,-56.936 h2.75
  text "o" at 156.082,-56.936 h2.75
  text "h" at 157.522,-56.936 h2.75
  text "m" at 158.963,-56.936 h2.75
  text ")" at 160.404,-56.936 h2.75
  text "：" at 161.845,-56.936 h2.75
  text "√" at 76.62,-56.995 h3
  text "□" at 76.977,-57.081 h2.75
  text "蓝" at 79.816,-57.081 h2.75
  text "色" at 82.656,-57.081 h2.75
  text "□" at 92.7,-57.081 h2.75
  text "其" at 95.54,-57.081 h2.75
  text "它" at 98.379,-57.081 h2.75
  text "2" at 178.268,-58.96 h2.75
  text "." at 179.706,-58.96 h2.75
  text "参考备注" at 160.672,-60.903 h2.75
  text "无" at 146.117,-61.075 h2.75
  text "要" at 149.002,-61.096 h2.75
  text "求" at 151.841,-61.096 h2.75
  text "□" at -67.457,-61.258 h2.75
  text "P" at -64.617,-61.258 h2.75
  text "o" at -63.176,-61.258 h2.75
  text "w" at -61.735,-61.258 h2.75
  text "e" at -60.295,-61.258 h2.75
  text "r" at -58.854,-61.258 h2.75
  text "P" at -57.413,-61.258 h2.75
  text "C" at -55.972,-61.258 h2.75
  text "B" at -54.531,-61.258 h2.75
  text "□" at -41.278,-61.258 h2.75
  text "柔" at -38.439,-61.258 h2.75
  text "性" at -35.599,-61.258 h2.75
  text "线" at -32.76,-61.258 h2.75
  text "路" at -29.92,-61.258 h2.75
  text "板" at -27.081,-61.258 h2.75
  text "□" at -14.043,-61.258 h2.75
  text "其" at -11.203,-61.258 h2.75
  text "他" at -8.363,-61.258 h2.75
  text "□" at -0.805,-61.258 h2.75
  text "其" at 2.034,-61.258 h2.75
  text "他" at 4.874,-61.258 h2.75
  text "□" at 13.743,-61.258 h2.75
  text "其" at 16.583,-61.258 h2.75
  text "他" at 19.422,-61.258 h2.75
  text "□" at 32.774,-61.258 h2.75
  text "其" at 35.614,-61.258 h2.75
  text "他" at 38.453,-61.258 h2.75
  text "□" at 51.806,-61.258 h2.75
  text "沉" at 54.645,-61.258 h2.75
  text "金" at 57.485,-61.258 h2.75
  text "+" at 60.324,-61.258 h2.75
  text "金" at 61.765,-61.258 h2.75
  text "手" at 64.605,-61.258 h2.75
  text "指" at 67.444,-61.258 h2.75
  text "□" at 143.282,-61.258 h2.75
  text "□" at 157.589,-61.258 h2.75
  text "丝" at 76.977,-61.311 h2.75
  text "印" at 79.816,-61.311 h2.75
  text "颜" at 82.656,-61.311 h2.75
  text "色" at 85.495,-61.311 h2.75
  text "：" at 88.335,-61.311 h2.75
  text "□" at -67.457,-65.581 h2.75
  text "其" at -64.617,-65.581 h2.75
  text "他" at -61.778,-65.581 h2.75
  text "□" at -41.278,-65.581 h2.75
  text "其" at -38.439,-65.581 h2.75
  text "他" at -35.599,-65.581 h2.75
  text "□" at 51.806,-65.581 h2.75
  text "O" at 54.645,-65.581 h2.75
  text "S" at 56.086,-65.581 h2.75
  text "P" at 57.527,-65.581 h2.75
  text "/" at 58.968,-65.581 h2.75
  text "防" at 60.409,-65.581 h2.75
  text "氧" at 63.248,-65.581 h2.75
  text "化" at 66.088,-65.581 h2.75
  text "处" at 68.927,-65.581 h2.75
  text "理" at 71.767,-65.581 h2.75
  text "叠" at 143.282,-65.581 h2.75
  text "层" at 146.122,-65.581 h2.75
  text "结" at 148.962,-65.581 h2.75
  text "构" at 151.801,-65.581 h2.75
  text "：" at 154.641,-65.581 h2.75
  text "□" at 76.977,-65.633 h2.75
  text "√" at 77.56,-65.628 h3
  text "白" at 79.816,-65.633 h2.75
  text "色" at 82.656,-65.633 h2.75
  text "□" at 92.7,-65.633 h2.75
  text "黄" at 95.54,-65.633 h2.75
  text "色" at 98.379,-65.633 h2.75
  text "D" at -71.372,-69.786 h1.78
  text "D" at 220.448,-69.786 h1.78
  text "□" at 51.806,-69.904 h2.75
  text "其" at 54.645,-69.904 h2.75
  text "它" at 57.485,-69.904 h2.75
  text "□" at 143.282,-69.904 h2.75
  text "默" at 146.122,-69.904 h2.75
  text "认" at 148.962,-69.904 h2.75
  text "□" at 157.565,-69.904 h2.75
  text "特" at 160.404,-69.904 h2.75
  text "殊" at 163.244,-69.904 h2.75
  text "要" at 166.083,-69.904 h2.75
  text "求" at 168.923,-69.904 h2.75
  text "□" at 76.977,-69.956 h2.75
  text "黑" at 79.816,-69.956 h2.75
  text "色" at 82.656,-69.956 h2.75
  text "□" at 92.7,-69.956 h2.75
  text "其" at 95.54,-69.956 h2.75
  text "它" at 98.379,-69.956 h2.75
  text "选" at -14.947,-75.421 h3.08
  text "中" at -11.769,-75.421 h3.08
  text "请" at -8.59,-75.421 h3.08
  text "常规要求加工！" at -5.412,-75.421 h3.08
  text "未" at -18.158,-75.524 h3.08
  text "注" at -67.315,-75.571 h3.08
  text "：" at -64.136,-75.571 h3.08
  text "1" at -60.957,-75.571 h3.08
  text "." at -59.347,-75.571 h3.08
  text "□" at -57.737,-75.571 h3.08
  text "√" at -57.154,-75.566 h3
  text "选" at -52.947,-75.571 h3.08
  text "中" at -49.769,-75.571 h3.08
  text "请" at -46.59,-75.571 h3.08
  text "按" at -43.412,-75.571 h3.08
  text "此" at -40.233,-75.571 h3.08
  text "要" at -37.055,-75.571 h3.08
  text "求" at -33.876,-75.571 h3.08
  text "加" at -30.697,-75.571 h3.08
  text "工" at -27.519,-75.571 h3.08
  text "，" at -24.34,-75.571 h3.08
  text "□" at -21.308,-75.624 h3.08
  text "2." at -60.983,-80.374 h3.08
  text "技" at -61.058,-85.648 h2.75
  text "术" at -58.176,-85.648 h2.75
  text "Q" at -55.294,-85.648 h2.75
  text "Q" at -53.811,-85.648 h2.75
  text ":" at -52.327,-85.648 h2.75
  text "E" at -33.611,-85.648 h2.75
  text "-" at -32.127,-85.648 h2.75
  text "M" at -30.644,-85.648 h2.75
  text "A" at -29.161,-85.648 h2.75
  text "I" at -27.677,-85.648 h2.75
  text "L" at -26.194,-85.648 h2.75
  text "：" at -24.711,-85.648 h2.75
  text "2" at -50.689,-85.682 h2.75
  text "9" at -49.248,-85.682 h2.75
  text "6" at -47.807,-85.682 h2.75
  text "7" at -46.366,-85.682 h2.75
  text "7" at -44.925,-85.682 h2.75
  text "6" at -43.485,-85.682 h2.75
  text "9" at -42.044,-85.682 h2.75
  text "1" at -40.603,-85.682 h2.75
  text "2" at -39.162,-85.682 h2.75
  text "4" at -37.638,-85.682 h2.75
  text "_" at -17.823,-85.749 h2.75
  text "r" at -16.382,-85.749 h2.75
  text "d" at -14.941,-85.749 h2.75
  text "@" at -13.5,-85.749 h2.75
  text "i" at -12.059,-85.749 h2.75
  text "t" at -10.618,-85.749 h2.75
  text "c" at -9.178,-85.749 h2.75
  text "-" at -7.737,-85.749 h2.75
  text "p" at -6.296,-85.749 h2.75
  text "a" at -4.855,-85.749 h2.75
  text "." at -3.414,-85.749 h2.75
  text "c" at -1.973,-85.749 h2.75
  text "o" at -0.532,-85.749 h2.75
  text "m" at 0.909,-85.749 h2.75
  text "." at 2.35,-85.749 h2.75
  text "c" at 3.791,-85.749 h2.75
  text "n" at 5.232,-85.749 h2.75
  text "d" at -20.954,-85.809 h2.75
  text "a" at -19.424,-85.812 h2.75
  text "e" at -22.351,-85.874 h2.75
  text "核准：" at 177.823,-85.902 h3
  text "研" at 76.568,-85.924 h2.75
  text "发" at 79.45,-85.924 h2.75
  text "小" at 82.332,-85.924 h2.75
  text "组" at 85.214,-85.924 h2.75
  text "：" at 88.095,-85.924 h2.75
  text "产品名称：" at 13.739,-86.156 h3
  text "审核：" at 143.152,-86.156 h3
  text "设计：" at 115.847,-86.283 h3
  text "1" at -32.231,-90.156 h1.78
  text "2" at 40.413,-90.156 h1.78
  text "3" at 113.565,-90.156 h1.78
  text "4" at 186.463,-90.156 h1.78

## Dimensions
86,82 to 0,82 on Top Overlay
43,87 to 43,-5 on Top Overlay

## Text inside footprints (layer, text, board x,y; h text height)
J1: Bottom Overlay "2" at 39.619,1.069 h0.76 r90; Bottom Overlay "1" at 41.016,1.069 h0.76 r90; Mechanical 2 "2" at 42.07,58.078 h0.2 r270; Mechanical 2 "1" at 39.022,58.078 h0.2 r270; Mechanical 2 "79" at 39.2,8.911 h0.2 r270; Mechanical 2 "80" at 42.1,8.911 h0.2 r270
J2: Bottom Overlay "2" at 3.381,39.931 h0.76 r270; Bottom Overlay "1" at 1.984,39.931 h0.76 r270; Mechanical 2 "2" at 0.93,-17.078 h0.2 r90; Mechanical 2 "1" at 3.978,-17.078 h0.2 r90; Mechanical 2 "79" at 3.8,32.089 h0.2 r90; Mechanical 2 "80" at 0.9,32.089 h0.2 r90